# EAGLE board 5 LED Voltage Level Meter (EAGLE 6.2)
Voltage Level Meter with 5 LED for LiPo Akku with 22.2 V
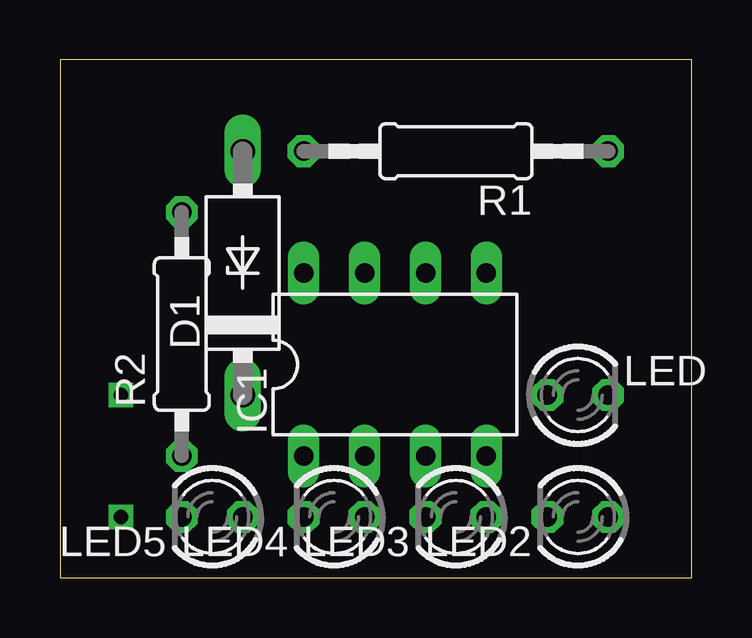
[diagram p0: board, top side]
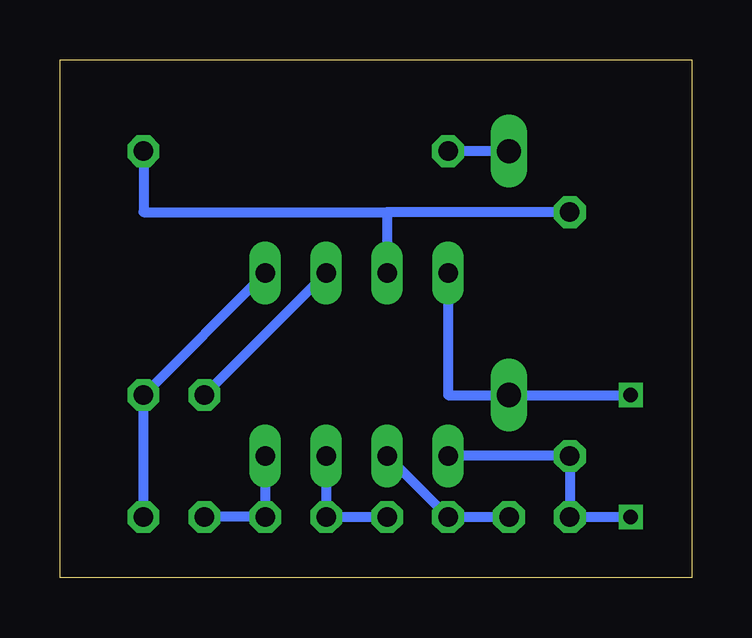
[diagram p1: board, bottom side, seen from below]

Size 26.34 x 21.58 mm. Coordinates in mm from the lower left corner, seen from the top.
Outline: 0,0 26.34,0 26.34,21.58 0,21.58 0,0
Copper layers (1*16): Top 0.035mm / dielectric 1.5mm / Bottom 0.035mm
Design rules: minimum track width 10mil, minimum drill 24mil, track to track 8mil, track to pad 8mil, pad to pad 8mil, via to via 8mil, smd to smd 8mil, copper to edge 40mil, drill to drill 8mil, minimum pad ring 10mil, minimum via ring 8mil, stop-mask expansion 4mil, vias tented up to drill 0mil, thermal gap 10mil

## Footprints (pad centres in the part's own frame; a part is rotated, then mirrored left to right if it is on the bottom)
F126Z10 = drill 1.016 long: A 5.08,0; C -5.08,0
DIL08 = drill 0.813 long: 1 -3.81,-3.81; 2 -1.27,-3.81; 3 1.27,-3.81; 4 3.81,-3.81; 5 3.81,3.81; 6 1.27,3.81; 7 -1.27,3.81; 8 -3.81,3.81
LED3MM = drill 0.813 octagon: A -1.27,0; K 1.27,0
0207/12 = drill 0.813 octagon: 1 -6.35,0; 2 6.35,0
0207/10 = drill 0.813 octagon: 1 -5.08,0; 2 5.08,0

## Placement (x,y rotation side)
D1  12 V  [F126Z10]  7.62,12.7 90 top
IC1  U267BG  [DIL08]  13.97,8.89 0 top
LED  Red  [LED3MM]  21.59,7.62 0 top
LED2  Red  [LED3MM]  21.59,2.54 180 top
LED3  yellow  [LED3MM]  16.51,2.54 180 top
LED4  green  [LED3MM]  11.43,2.54 180 top
LED5  green  [LED3MM]  6.35,2.54 180 top
R1  18k  [0207/12]  16.51,17.78 180 top
R2  2.7K  [0207/10]  5.08,10.16 90 top

## Library data of the parts
D1 = diode
IC1 = ic-package
LED LED2 = led; MF: VISHAY SEMICONDUCTOR; OC_FARNELL: 1612437
LED3 = led; MF: VISHAY SEMICONDUCTOR; OC_FARNELL: 1612439
LED4 LED5 = led; MF: VISHAY SEMICONDUCTOR; OC_FARNELL: 1612435
R1 R2 = resistor

## Nets
N$1: IC1.2 LED4.K LED5.A
N$2: IC1.3 LED3.K LED4.A
N$3: IC1.4 LED2.K LED3.A
N$4: IC1.5 LED2.A LED.K
N$5: IC1.6 LED.A
N$9: IC1.7 R1.1 R2.2
N$10: D1.A R1.2
V+: D1.C IC1.8
V-: IC1.1 LED5.K R2.1

## Tracks (layer width: path | path; a pad name or v marks a point on that pad's centre or on a via)
N$1
  Bottom 0.406: IC1.2 LED4.K LED5.A
N$2
  Bottom 0.406: IC1.3 LED3.K LED4.A
N$3
  Bottom 0.406: IC1.4 LED3.A LED2.K
N$4
  Bottom 0.406: LED2.A LED.K IC1.5
N$5
  Bottom 0.406: IC1.6 LED.A
N$9
  Bottom 0.406: R2.2 12.7,15.24 | 12.7,15.24 IC1.7 | R1.1 22.86,15.24 12.7,15.24
N$10
  Bottom 0.406: D1.A R1.2
V+  (via drill 0.6)
  Bottom 0.406: IC1.8 10.16,7.62 D1.C v2.54,7.62
V-  (via drill 0.6)
  Bottom 0.406: IC1.1 R2.1 LED5.K v2.54,2.54